# Altium PCB PCB1.PcbDoc
Units mm, origin at the board's own origin, x right, y up, seen from the top; angles counter-clockwise.
Board outline 85 x 50 mm, 2 copper layers (Top Layer, Bottom Layer); 17 components, 17 nets, 57 pads, 0 vias.
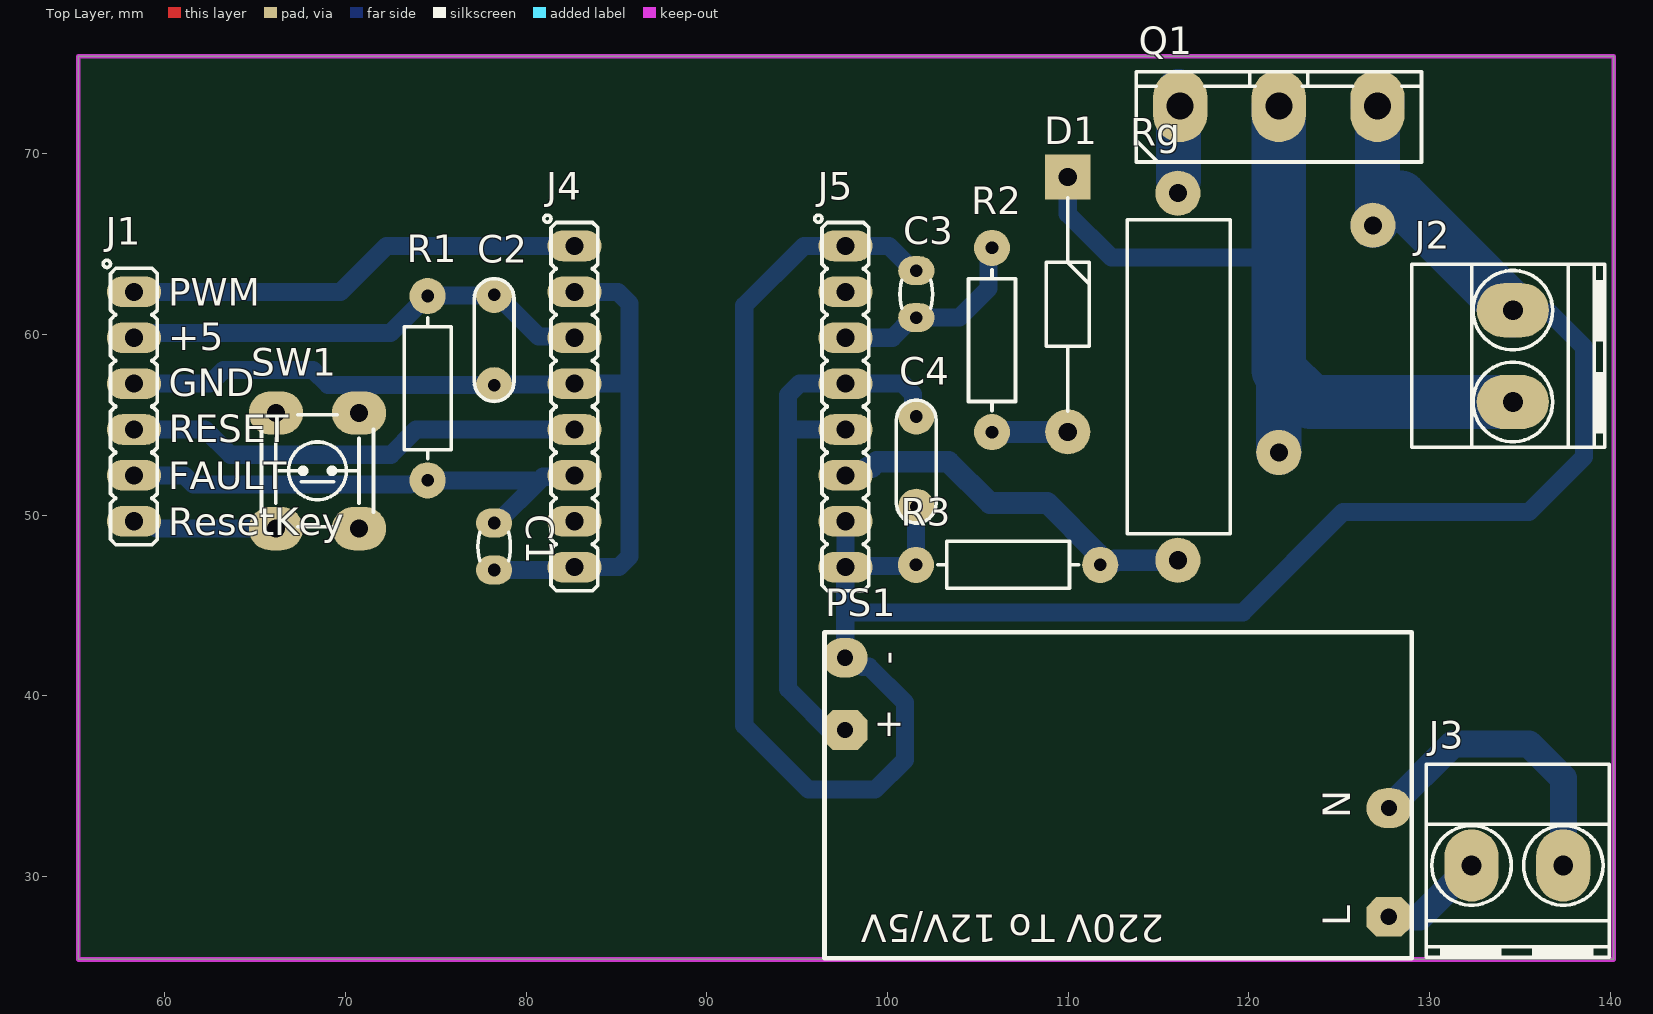
[diagram p0: Top Layer view]
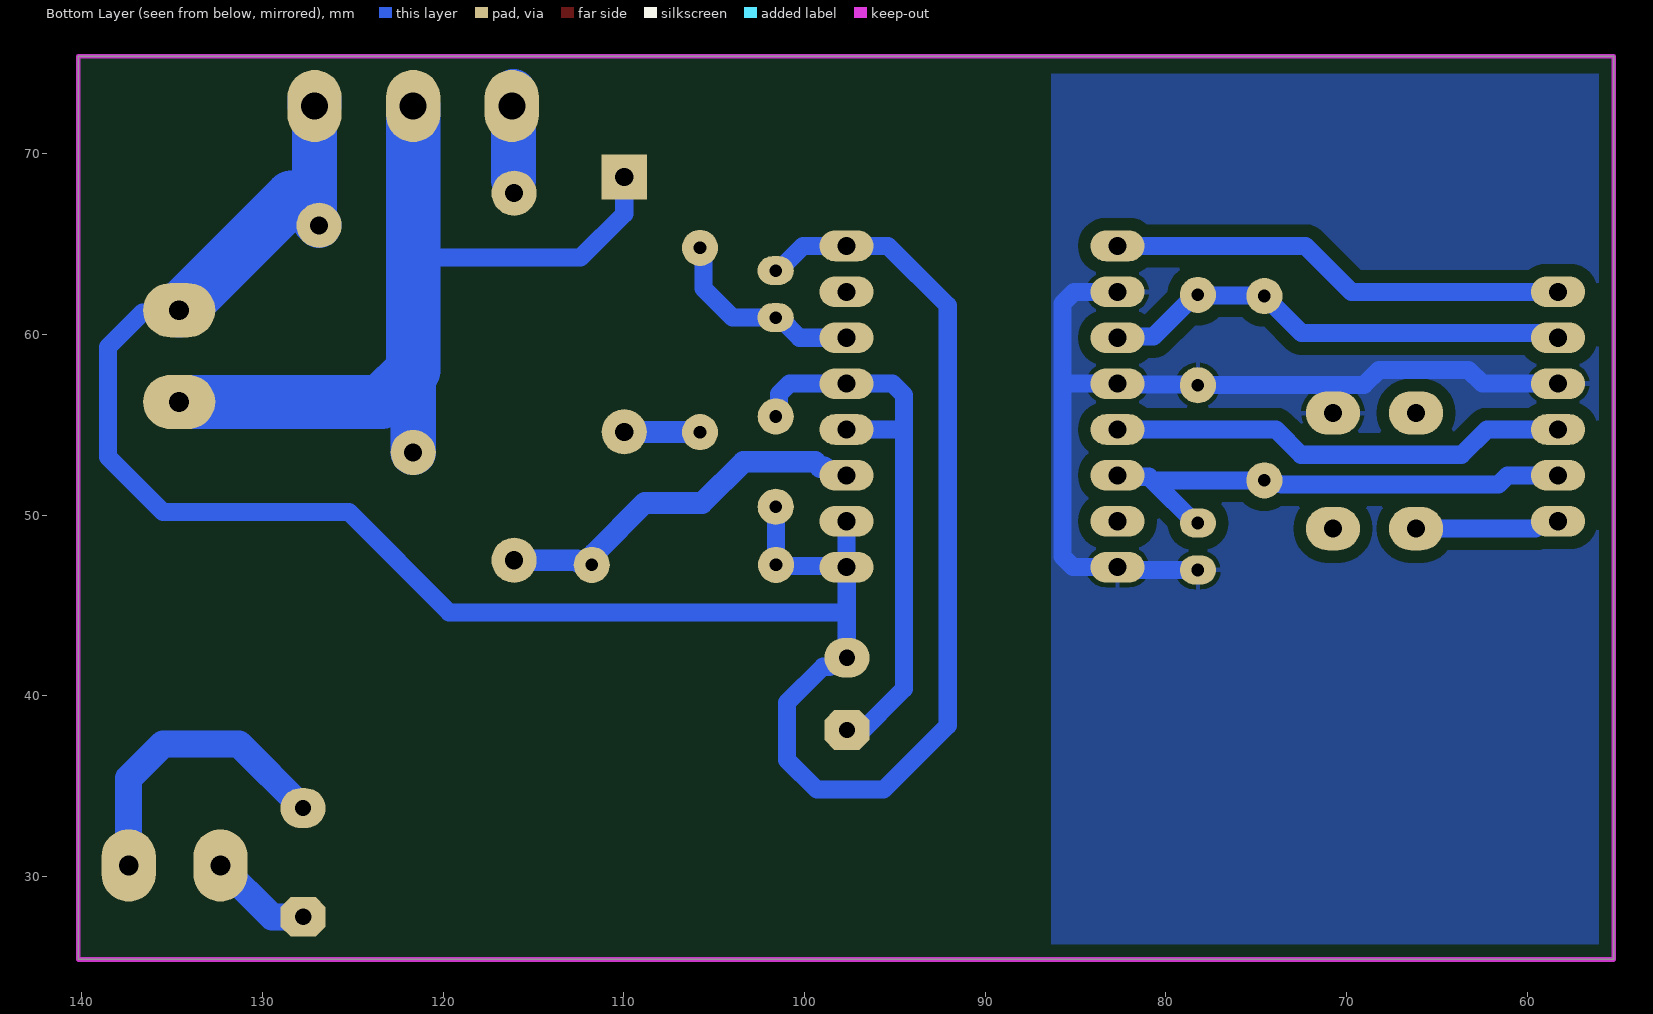
[diagram p1: Bottom Layer view, seen from below]
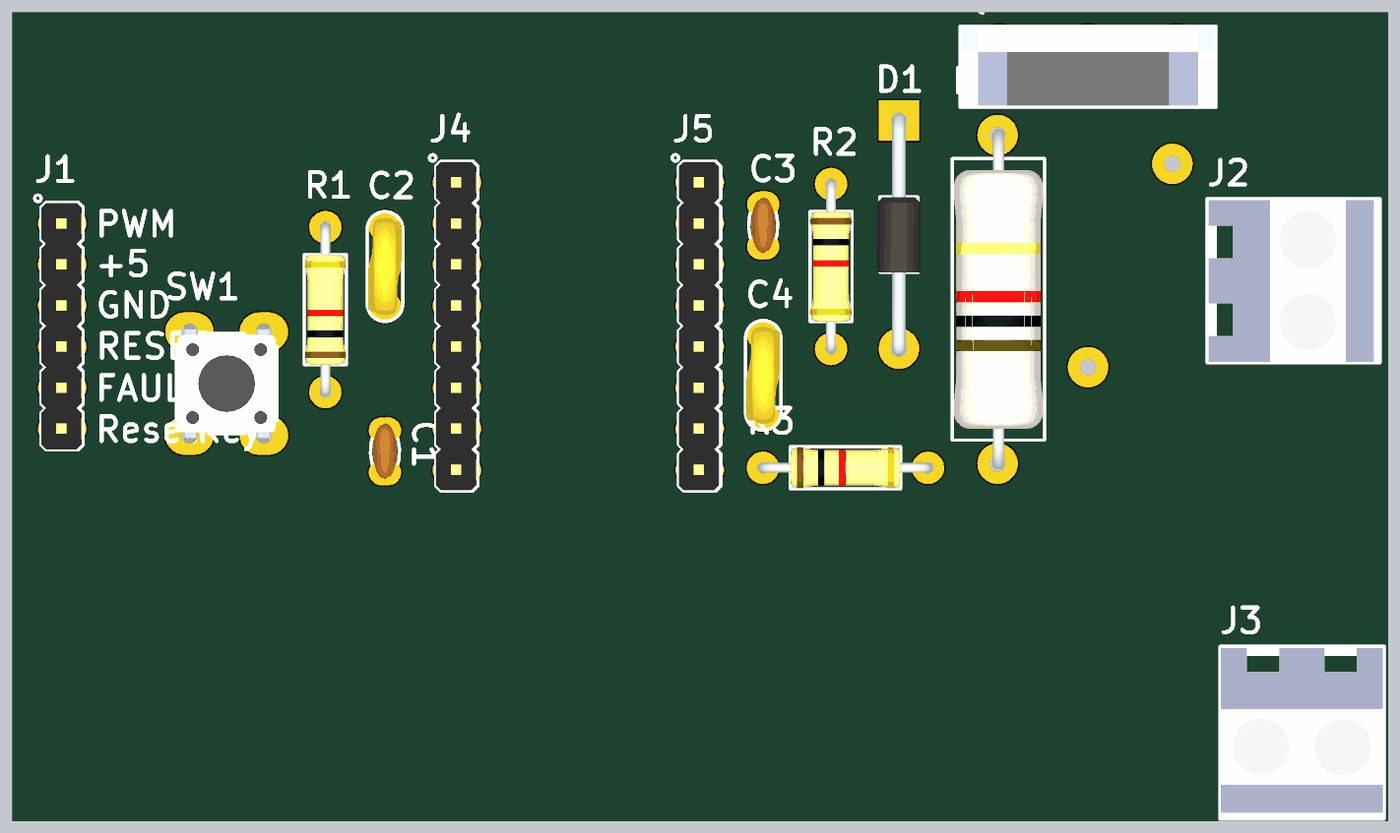
[diagram p2: 3D render of the assembled board from above, using the file's embedded part models]

## Layer stack, top to bottom
Top Solder: solder mask 0.0102, Solder Resist, Dk 3.5
Top Layer: signal copper 0.0356
Dielectric 1: dielectric 0.32, FR-4, Dk 4.8
Bottom Layer: signal copper 0.0356
Bottom Solder: solder mask 0.0102, Solder Resist, Dk 3.5

## Board outline
55.208,25.4 55.208,75.4 140.208,75.4 140.208,25.4

## Design rules (kind name [scope] priority, off if disabled: settings)
Clearance Clearance_1 [InNamedPolygon('GND_L02_P000')] p1: gap=0.7 ignorepadtopadclearanceinfootprint=FALSE except(0: Arc-Hole Track-Hole SMDPad-Hole THPad-Hole Via-Hole Fill-Hole Poly-Hole Region-Hole Text-Hole)
Clearance [All] p2: gap=0.254 ignorepadtopadclearanceinfootprint=FALSE except(0: Arc-Hole Track-Hole SMDPad-Hole THPad-Hole Via-Hole Fill-Hole Poly-Hole Region-Hole Text-Hole)
PolygonConnect [All] p1: connectstyle=Relief reliefconductorwidth=0.254 reliefentries=4 polygonreliefangle="90 Angle" airgapwidth=0.254
RoutingVias [All] p1: holewidth=0.711 width=1.27 viastyle="Through Hole" minholewidth=0.711 minwidth=1.27 maxholewidth=0.711 maxwidth=1.27
SolderMaskExpansion [All] p1: expansion=0.102 istentingtop=FALSE
Width [All] p1: maxlimit=3 minlimit=0.65 preferedwidth=1
30 further rules are at their usual default settings.

## Components (designator, comment, footprint, x,y, rotation, side; value= is the part's Value field where it differs from the comment)
C1 "330pF" C_CER_D3 78.232,48.26 r270 top
C2 "100nF" C_CER_D6B 78.232,59.69 r90 top
C3 "100pF" C_CER_D3 101.6,62.23 r270 top
C4 "100nF" C_CER_D6B 101.6,52.959 r90 top
D1 "BYV26E" DIOAD1411W86L465D236 109.982,68.71 r270 top
J1 "HDR1X6" HDR_M_1X6 58.293,56.007 r270 top value=HDRM6
J2 "CONN_TB2" TBG_2 134.62,58.801 r270 top
J3 "CONN_TB2" TBG_2 134.874,30.607 r180 top
J4 "HDR1X8" HDR_M_1X8 82.677,56.007 r270 top value=HDRM8
J5 "HDR1X8" HDR_M_1X8 97.677,56.007 r270 top value=HDRM8
PS1 "12V_5V Module" "12V_5V Module" 105.551,9.215 r90 top
Q1 "GT40QR21" TO247_3 121.666,72.644 r0 top
R1 "3K3" R025W_AX04 74.549,57.023 r90 top
R2 "100R" R025W_AX04 105.791,59.69 r270 top
R3 "47K" R025W_AX04 106.68,47.244 r0 top
Rg "12R" R2W_AX08 116.078,57.658 r90 top
SW1 "PUSHBUTTON" SWPBT_SPDT_6X6X5 68.453,52.451 r90 top

## Footprints (in the part's own frame and the unit in brackets; to place one, negate y for a bottom-side part, rotate by r counter-clockwise, add the part's x,y. Pads: shape width x height; smd on the part's side, far side on the other; paste and mask are expansions set on the pad)
"12V_5V Module" [mm] "220V to 12V_5V Module"
  oct 2.2x2.5 hole 0.9: 1(18.544,-22.207) 3(28.892,7.893)
  oval 2.2x2.5 hole 0.9: 2(24.567,-22.211) 4(32.892,7.893)
  silkscreen extent 16.26,-23.48 34.29,9.04
C_CER_D3 [mm] "CAP, CER MULTILAYER, D:3.5mm, pitch: 2.54mm"
  oval 1.6x2 hole 0.7: 1(-1.3,0) 2(1.3,0)
  silkscreen extent -0.78,-0.9 0.78,0.9, body extent -1.75,-0.75 1.75,0.75, height 4
C_CER_D6B [mm] "CAP, CER MULTILAYER, 6X2mm, pitch: 5mm"
  round 2 hole 0.7 mask+0.075: 1(-2.5,0) 2(2.5,0)
  silkscreen extent -3.4,-1.1 3.4,1.1, body extent -3,-1.05 3,1.05, height 8.1
DIOAD1411W86L465D236 [mm]
  rect 2.5x2.5 hole 1: 1(0,0)
  round 2.5 hole 1: 2(14.1,0)
  silkscreen extent 1.14,-1.18 12.96,1.18, body extent -0.43,-1.37 14.54,1.37, height 2.73
HDR_M_1X6 [mm] "Connector; Header; 6 Position"
  oval 1.7x3 hole 1 mask+0.1: 1(-6.35,0) 2(-3.81,0) 3(-1.27,0) 4(1.27,0) 5(3.81,0) 6(6.35,0)
  silkscreen extent -8.1,-1.7 7.65,1.3, body extent -7.62,-1.3 7.62,1.19, height 8.54
HDR_M_1X8 [mm] "Connector; Header; 8 Position"
  oval 1.7x3 hole 1 mask+0.1: 1(-8.89,0) 2(-6.35,0) 3(-3.81,0) 4(-1.27,0) 5(1.27,0) 6(3.81,0) 7(6.35,0) 8(8.89,0)
  silkscreen extent -10.6,-1.7 10.19,1.3, body extent -10.16,-1.3 10.16,1.19, height 8.54
R2W_AX08 [mm] "RESISTOR 2 WATT, AXIAL0.8"
  round 2.5 hole 1: 1(-10.16,0) 2(10.16,0)
  silkscreen extent -8.7,-2.9 8.7,2.8, body extent -10.51,-2.8 10.51,2.7, height 5.5
R025W_AX04 [mm] "RESISTOR 1/4 WATT, AXIAL0.4"
  round 2 hole 0.7: 1(-5.1,0) 2(5.1,0)
  silkscreen extent -3.9,-1.3 3.9,1.3, body extent -5.38,-1.28 5.38,1.28, height 2.6
SWPBT_SPDT_6X6X5 [mm] "SWITCH, PUSHBUTTON, THD, SPDT, 6X6mm"
  oval 2.4x3 hole 1 mask+0.1: 1(-3.2,2.3) 2(-3.2,-2.3) 3(3.2,-2.3) 4(3.2,2.3)
  silkscreen extent -3.1,-3.1 3.1,3.1, body extent -3.87,-3.01 3.87,3.02, height 5.01
TBG_2 [mm] "Terminal Block Green"
  oval 3x4 hole 1.1: 1(-2.54,0) 2(2.54,0)
  silkscreen extent -5.08,-5.6 5.05,5.08, body extent -5,-5.5 5,5, height 14
TO247_3 [mm] "TO247, TO-247, TO-3P pitch: 5.5mm 16x5mm, TO-218"
  oval 3x4 hole 1.5: 1(-5.461,0) 2(0,0) 3(5.461,0)
  silkscreen extent -7.9,-3.1 7.9,1.9, body extent -7.8,-3 7.8,1.8, height 23.9

## Part data
C1 C2 C3 C4: library part CAP_THD_CERML, "CAP, THD, CER MULTI LAYER,", ASSEMBLY=ASSEMBLY, DESC="CAP, CER MULTI LAYER,", MANF=MANF, MANF_P#=MANF_PART#, PARAM=50V, PARAM2=PARAM2, PRICE="100= 1$"
D1: "Diode", Manufacturer_Name="EIC Semiconductor", Arrow Part Number=BYV26E, Arrow Price/Stock=https://www.arrow.com/en/products/byv26e/eic-semiconductor, Datasheet Link=https://www.arrow.com/en/products/byv26e/eic-semiconductor, Manufacturer_Part_Number=BYV26E
J1: library part HDR_M_1X6, "CONN, HEADER, Male, pitch: 2.54mm, 6POS"
J2 J3: "CONN, TERMINAL BLOCK, 5.08mm pitch"
J4 J5: library part HDR_M_1X8, "CONN, HEADER, Male, pitch: 2.54mm, 8POS"
PS1: "220V to 12V/15V Module"
Q1: library part IGBT, "IGBT", Package="TO-247 Fairchild Semiconductor", Availability=Unavailable, MF="ON Semiconductor", MP=FGH40N60SFDTU, PRICE=None, SnapEDA_Link=https://www.snapeda.com/parts/FGH40N60SFDTU/ON%20Semiconductor/view-part/405516/?ref=snap
R1 R2 R3 Rg: library part RES_THD, "RESISTOR, THD", ASSEMBLY=ASSEMBLY, DESC=DESCRIPTION, DIST#=MOUSER, MANF="KOA SPEER", MANF_P#=RK73H1ETTP4701F, PARAM=0.063W, PARAM2=1%, PRICE="100= 0.5$"
SW1: library part SWPBT_SPDT_6X6X5, "SWITCH, PUSH BUTTON, TACTILE, THD, SPDT, 4X4MM", ASSEMBLY=ASSEMBLY, DESC=DESCRIPTION, MANF=-, MANF_P#=-, PARAM=PARAM, PRICE=PRICE

## Free pads (board coordinates)
  round 2.5 hole 1: 10(121.666,53.467) 11(126.873,66.04)

## Nets (pads, with @x,y where several pads share a name; then routed paths per layer and width w, separated by ;. In a path a pad name is that pad's centre, name@x,y a point inside that pad or via, vN(x,y) a via of type N, cw(c..) or ccw(c..) an arc to the next point about the centre after c; other vN are vias at no path point)
+5: C2.2 J1.2 J4.3 R1.2 | length 26.4
  Bottom Layer w1: J1.2@58.168,60.071 72.497,60.071 R1.2 74.583,62.157 78.198,62.157 C2.2 78.399,62.19 80.695,59.894 82.6,59.894 J4.3
+25: C4.2 J5.4 J5.5 PS1.3 | length 32.9
  Bottom Layer w1: J5.4@96.824,57.2 97.6,57.2 J5.4 ; PS1.3@97.155,37.719 94.488,40.386 94.488,54.864 ; J5.5 94.615,54.737 94.488,54.864 ; C4.2 101.423,55.636 101.423,56.691 100.838,57.277 J5.4 ; 94.488,54.864 94.488,56.642 95.123,57.277 J5.4
Fault: C1.1 J1.5 J4.6 R1.1 | length 28.3
  Bottom Layer w1: J1.5 61.087,52.197 61.595,51.689 73.608,51.689 73.651,51.732 74.358,51.732 R1.1 80.741,51.923 ; C1.1 78.378,49.56 80.741,51.923 ; J4.6 82.6,52.12 80.938,52.12 80.741,51.923
GND: C1.2 C2.1 J1.3 J4.2 J4.4 J4.8 SW1.3 | length 53.3
  Bottom Layer w1: J1.3 62.484,57.277 63.246,58.039 68.199,58.039 69.048,57.19 C2.1 78.276,57.233 82.633,57.233 J4.4 85.725,57.277 ; C1.2 82.412,46.96 82.569,47.117 85.139,47.117 85.725,47.703 85.725,57.277 ; J4.2 85.09,62.357 85.725,61.722 85.725,57.277
GND1: C3.1 C4.1 J2.1 J5.1 J5.7 J5.8 pad.11 PS1.4 Q1.3 R3.1 | length 139.2
  Bottom Layer w1: PS1.4@97.38,41.877 98.362,41.877 98.634,41.606 98.983,41.606 100.965,39.624 100.965,36.449 99.314,34.798 95.631,34.798 92.075,38.354 92.075,61.595 95.377,64.897 J5.1 100.087,64.897 101.454,63.53 C3.1 ; PS1.4 97.667,42.117 97.667,44.612 ; J5.7 J5.8 ; C4.1 101.59,50.449 101.59,47.254 R3.1 101.517,47.18 97.741,47.18 J5.8 ; J2.1@134.747,61.22 136.646,61.22 138.557,59.309 138.557,53.213 135.509,50.165 125.222,50.165 119.669,44.612 97.667,44.612 ; 97.667,44.612 97.667,47.107 J5.8
  Bottom Layer w2.5: pad.11 127.127,66.294 Q1.3
  Bottom Layer w3: Q1.3 Q1.3@127.127,73.025 ; 128.397,67.564 J2.1
NetC3_2: C3.2 J5.3 R2.1 | length 11.4
  Bottom Layer w1: J5.3 100.277,59.817 101.39,60.93 C3.2 103.983,60.93 105.6,62.547 105.6,64.599 R2.1
NetD1_1: D1.1 J2.2 pad.10 Q1.2 | length 47.6
  Bottom Layer w1: D1.1 109.982,66.675 112.395,64.262 121.666,64.262
  Bottom Layer w2.5: pad.10 121.666,53.721 121.666,58.018
  Bottom Layer w3: Q1.2 121.666,64.262 121.666,58.018 123.423,56.261 J2.2
NetD1_2: D1.2 R2.2 | length 4.2
  Bottom Layer w1: R2.2 R2.2@105.801,54.6 ; D1.2@109.972,54.6 D1.2
  Bottom Layer w1.2: R2.2@105.801,54.6 D1.2@109.972,54.6
NetIC1_7: J4.7
NetIC1_11: J5.6 R3.2 Rg.1 | length 21.5
  Bottom Layer w1.2: J5.6 98.462,52.197 98.919,52.654 99.119,52.654 99.423,52.958 103.379,52.958 105.665,50.672 108.841,50.672 111.627,47.887 111.627,47.397 R3.2 111.933,47.397 112.499,47.397 112.6,47.498 Rg.1
NetIC1_15: J5.2
NetJ3_1: J3.1 PS1.2 | length 16.7
  Bottom Layer w1.5: PS1.2 131.318,37.338 135.509,37.338 137.414,35.433 J3.1
NetJ3_2: J3.2 PS1.1 | length 5.8
  Bottom Layer w1.5: PS1.1 129.486,27.759 J3.2
NetQ1_1: Q1.1 Rg.2 | length 5.2
  Bottom Layer w1: Rg.2@116.036,68.453 Rg.2@116.12,68.538 ; Q1.1@116.12,73.448 Q1.1@116.205,73.533
  Bottom Layer w2.5: Rg.2@116.12,68.538 Q1.1@116.12,73.448
PWM: J1.1 J4.1 | length 25.4
  Bottom Layer w1: J1.1 69.723,62.357 72.263,64.897 J4.1
Reset: J1.4 J4.5 | length 25.5
  Bottom Layer w1: J1.4 62.23,54.737 63.627,53.34 72.517,53.34 73.914,54.737 J4.5
ResetKey: J1.6 SW1.1 | length 8
  Bottom Layer w1: J1.6 59.132,49.657 59.538,49.251 SW1.1
pads on no net: SW1.2 SW1.4

## Polygon pours and split planes (outlines as drawn)
GND on Bottom Layer "GND_L02_P000" (solid, remove dead copper, pour order 0): 86.36,74.422 86.36,26.035 56.007,26.035 55.88,26.162 55.88,74.422

## Keep-outs
Keep-Out Layer:
  the board outline again, w0.254

## Silkscreen, mask and mechanical layers (free items; w line width, h text height)
Top Overlay:
  text "PWM" at 60.198,61.595 h1.52
  text "+5" at 60.201,59.121 h1.52
  text "GND" at 60.23,56.578 h1.52
  text "RESET" at 60.23,54.038 h1.52
  text "FAULT" at 60.198,51.435 h1.52
  text "ResetKey" at 60.198,48.895 h1.52

## Text inside footprints (layer, text, board x,y; h text height)
PS1: Top Overlay "220V To 12V/5V" at 115.33,27.884 h1.52 r180; Top Overlay "N" at 125.617,33.218 h1.52 r90; Top Overlay "L" at 125.617,27.249 h1.52 r90; Top Overlay "-" at 100.725,41.727 h1.52 r90; Top Overlay "+" at 100.725,37.536 h1.52 r90